# Altium PCB sensorpcb1.PcbDoc
Units mm, origin at the board's own origin, x right, y up, seen from the top; angles counter-clockwise.
Board outline 25.78 x 17.14 mm, 2 copper layers (Top Layer, Bottom Layer); 11 components, 9 nets, 35 pads, 1 vias.
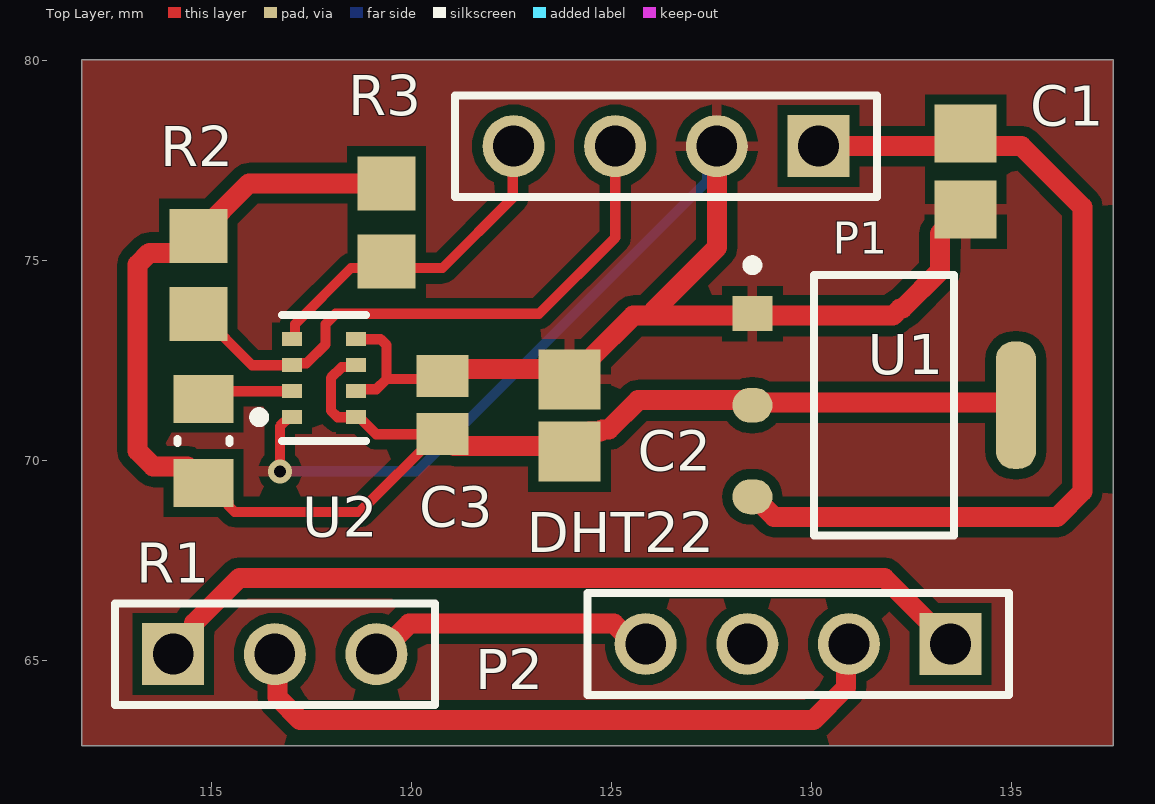
[diagram p0: Top Layer view]
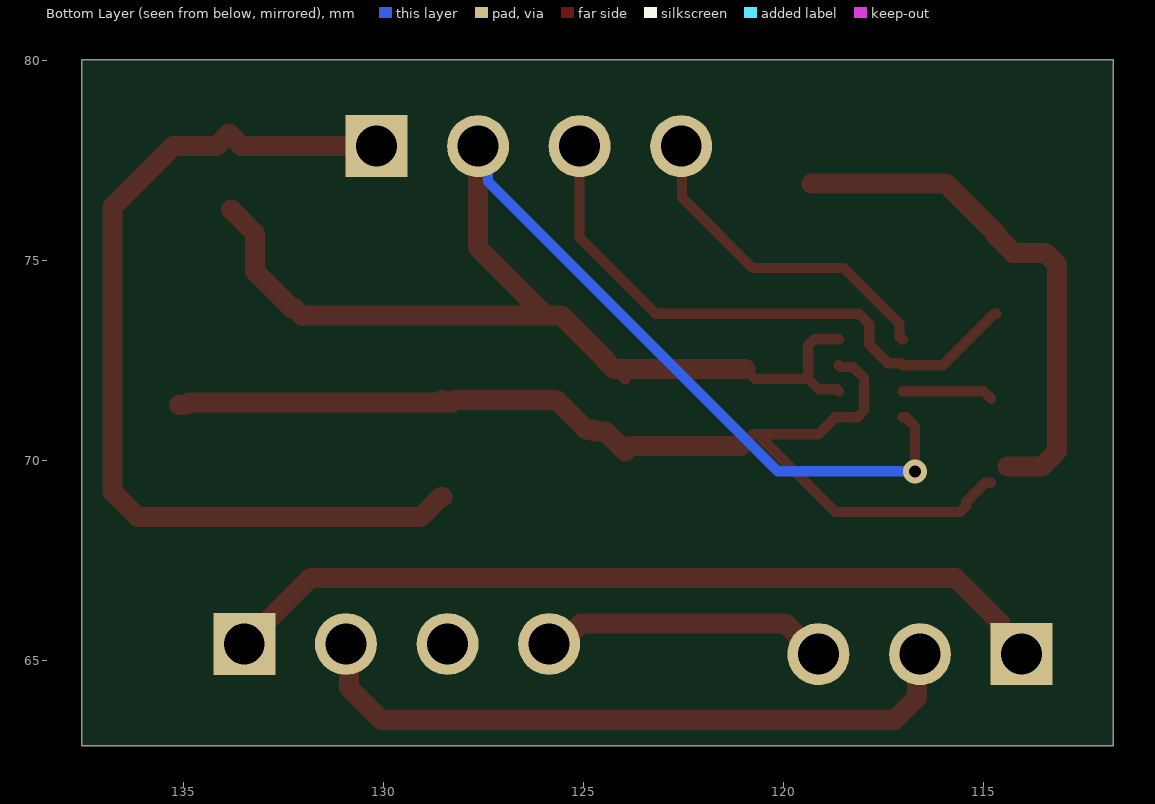
[diagram p1: Bottom Layer view, seen from below]
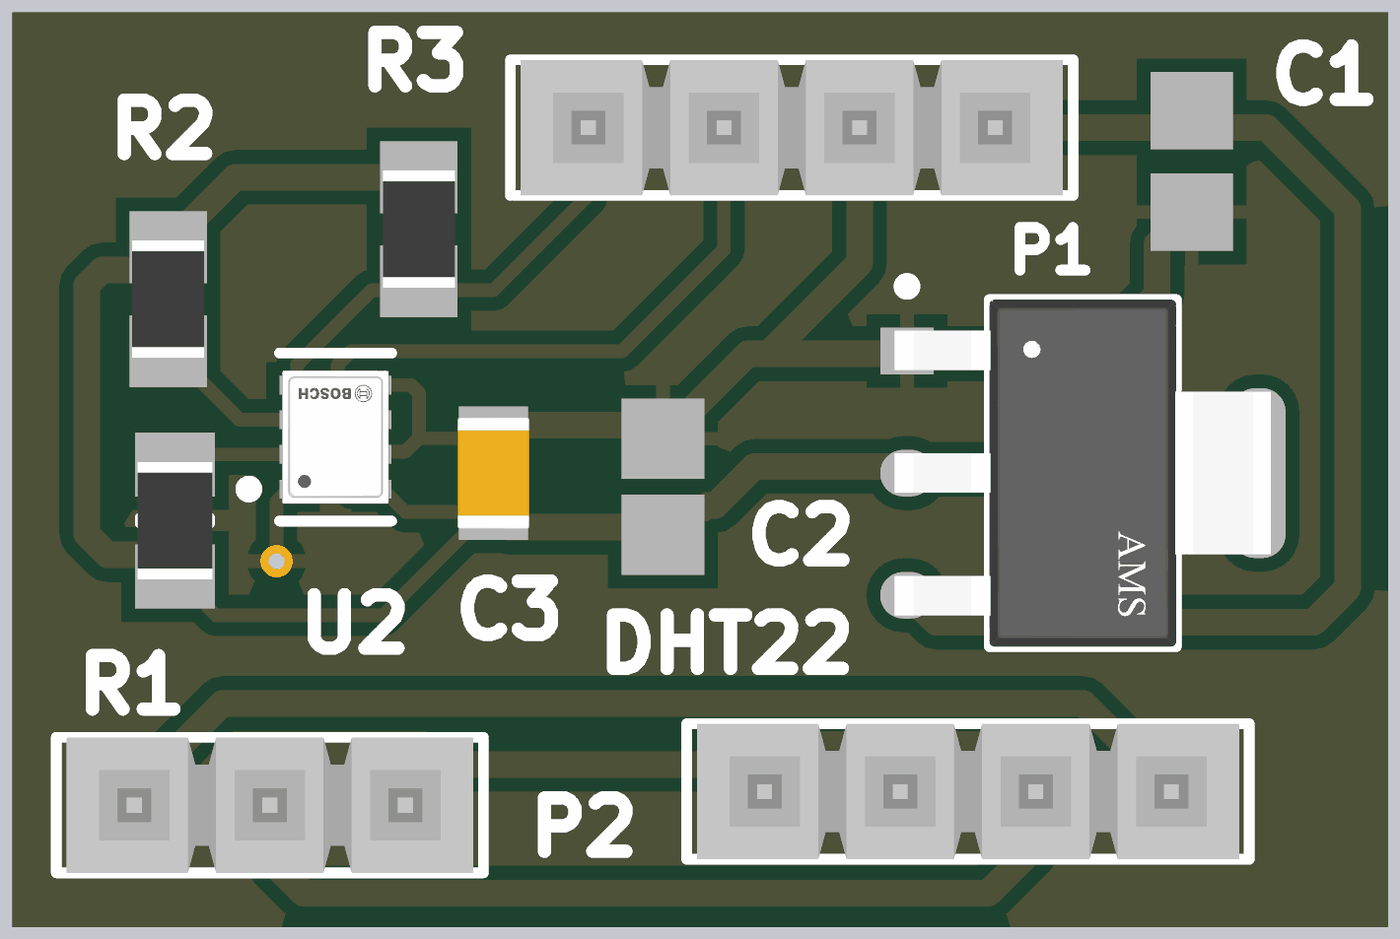
[diagram p2: 3D render of the assembled board from above, using the file's embedded part models]

## Layer stack, top to bottom
Top Solder: solder mask 0.0102, Solder Resist, Dk 3.5
Top Layer: signal copper 0.0356
Dielectric 1: dielectric 0.32, FR-4, Dk 4.8
Bottom Layer: signal copper 0.0356
Bottom Solder: solder mask 0.0102, Solder Resist, Dk 3.5

## Board outline
111.76,62.865 111.76,80.01 137.541,80.01 137.541,62.865

## Design rules (kind name [scope] priority, off if disabled: settings)
Clearance [All] p1: gap=0.254 ignorepadtopadclearanceinfootprint=FALSE
PolygonConnect [All] p1: connectstyle=Relief reliefconductorwidth=0.254 reliefentries=4 polygonreliefangle="90 Angle" airgapwidth=0.254
RoutingVias [All] p1: holewidth=0.711 width=1.27 viastyle="Through Hole" minholewidth=0.711 minwidth=1.27 maxholewidth=0.711 maxwidth=1.27
SolderMaskExpansion [All] p1: expansion=0 istentingtop=FALSE
SupplyNets "Schematic Supply Nets" [InNet('GND')] p1: voltage=0.000
Width [All] p1: maxlimit=0.5 minlimit=0.254 preferedwidth=0.254 minimp=50.000000 maximp=50.000000 favimp=50.000000
30 further rules are at their usual default settings.

## Components (designator, comment, footprint, x,y, rotation, side; value= is the part's Value field where it differs from the comment)
C1 "100nf" CAPC2013X135X50ML15T20 133.858,77.216 r270 top
C2 "10uf" CAPC2013X140X50ML20T25 123.952,71.12 r270 top
C3 "Capacitor 100 nF +/-10% 50 V 0805" CAPC2013X95X50LL10T25 120.777,71.374 r90 top value=100nF
DHT22 "MTSW-104-07-G-S-170" SMTC-MTSW-104-07-X-S-170 133.477,65.405 r180 top
P1 "MTSW-104-07-G-S-170" SMTC-MTSW-104-07-X-S-170 130.175,77.851 r180 top
P2 "TSW-103-07-G-S" SMTC-TSW-103-07-X-S 114.046,65.151 r0 top
R1 "Resistor 10k +/-1% 0805 125 mW" RESC2013X50X35ML15T15 114.808,70.485 r90 top value=10k
R2 "Resistor 4k7 +/-1% 0805 125 mW" RESC2013X70X40ML20T20 114.681,74.635 r90 top value=4.7k
R3 "Resistor 4k7 +/-1% 0805 125 mW" RESC2013X70X40ML20T20 119.38,75.946 r270 top value=4.7k
U1 "AMS1117-3.3" FP-AMS1117-IPC_C 131.819,71.374 r0 top
U2 "BMP280" FP-BMP280-MFG 117.818,72.05 r180 top

## Footprints (in the part's own frame and the unit in brackets; to place one, negate y for a bottom-side part, rotate by r counter-clockwise, add the part's x,y. Pads: shape width x height; smd on the part's side, far side on the other; paste and mask are expansions set on the pad)
CAPC2013X95X50LL10T25 [mm] "Chip Capacitor, 2-Leads, Body 2.10x1.35mm, IPC High Density"
  rect 1.05x1.3 smd: 1(-0.725,0) 2(0.725,0)
  body extent -1.05,-0.67 1.05,0.67, height 0.95
CAPC2013X135X50ML15T20 [mm] "Chip Capacitor, 2-Leads, Body 2.00x1.25mm, IPC Low Density"
  rect 1.45x1.55 smd: 1(-0.95,0) 2(0.95,0)
  body extent -1.08,-0.7 1.07,0.7, height 1.35
CAPC2013X140X50ML20T25 [mm] "Chip Capacitor, 2-Leads, Body 2.00x1.25mm, IPC Low Density"
  rect 1.5x1.55 smd: 1(-0.9,0) 2(0.9,0)
  body extent -1.1,-0.72 1.1,0.72, height 1.4
FP-AMS1117-IPC_C [mm]
  rect 1.004x0.872 smd paste+0 mask+0: 1(-3.295,2.29)
  rrect100% 1.004x0.872 smd paste+0 mask+0: 2(-3.295,0) 3(-3.295,-2.29)
  rrect87% 1.004x3.182 smd paste+0 mask+0: 4(3.295,0)
  silkscreen extent -3.42,-3.25 1.75,3.62, body extent -3.9,-3.35 3.9,3.35, height 0.25
FP-BMP280-MFG [mm]
  rect 0.5x0.35 smd paste+0 mask+0: 1(0.8,0.975) 2(0.8,0.325) 3(0.8,-0.325) 4(0.8,-0.975) 5(-0.8,-0.975) 6(-0.8,-0.325) 7(-0.8,0.325) 8(-0.8,0.975)
  silkscreen extent -1.05,-1.58 1.75,1.58, body extent -1.55,-1.8 1.55,1.8, height 0.25
RESC2013X50X35ML15T15 [mm] "Chip Resistor, 2-Leads, Body 2.2x1.4mm, IPC Low Density"
  rect 1.2x1.5 smd: 1(-1.05,0) 2(1.05,0)
  silkscreen extent -0.05,-0.65 0.05,0.65, body extent -1.1,-0.7 1.1,0.7, height 0.5
RESC2013X70X40ML20T20 [mm] "Chip Resistor, 2-Leads, Body 2.2x1.35mm, IPC Low Density"
  rect 1.35x1.45 smd: 1(-0.975,0) 2(0.975,0)
  body extent -1.1,-0.67 1.1,0.67, height 0.7
SMTC-MTSW-104-07-X-S-170 [mm] "Assembly .025\" [.64] SQ Post Terminal Strip, 1x4 Pins, Vertical, 2.54mm Pitch, Male"
  rect 1.55x1.55 hole 1.02: 1(0,0)
  round 1.55 hole 1.02: 2(2.54,0) 3(5.08,0) 4(7.62,0)
  silkscreen extent -1.46,-1.27 9.08,1.27, body extent -1.27,-1.27 8.89,1.27, height 6.86
SMTC-TSW-103-07-X-S [mm] ".025 SQ Post Terminal Strip Assembly, 1x3 Pins, Vertical, 2.54mm Pitch, Male"
  rect 1.55x1.55 hole 1.02: 1(0,0)
  round 1.55 hole 1.02: 2(2.54,0) 3(5.08,0)
  silkscreen extent -1.46,-1.27 6.54,1.27, body extent -1.27,-1.27 6.35,1.27, height 8.38

## Part data
C1: library part CMP-2007-03440-1, Manufacturer=Vitramon, Part Number=VJ0805Y104KXATW1BC
C2: library part CMP-2007-04644-1, Manufacturer="AVX Interconnect / Elco", Part Number=08056D106KAT4A
C3: library part CMP-001-00018-6, "Chip Capacitor, 100 nF, +/- 10%, 50 V, 0805 (2012 Metric)", Capacitor Type=Ceramic, Case/Package=0805, Max Operating Temperature=125°C, Min Operating Temperature=-55°C, Tolerance=10%, Voltage Rating=50V, Mounting Technology=SM, Pins=2, RoHS Compliant=True
DHT22 P1: library part CMP-1024-00104-1, "Modified .025\" SQ Post Header, Through-hole, Vertical, -55 to 125 degC, 2.54 mm Pitch, 4-Pin, Male, RoHS", Manufacturer=Samtec, Temperature Range="-55 to 125 degC", ComponentLink1Description="Manufacturer URL", ComponentLink1URL=http://www.samtec.com, ComponentLink2Description=Datasheet, ComponentLink2URL=http://www.samtec.com/documents/webfiles/pdf/MTSW.PDF, ComponentLink3Description="Package Specification", ComponentLink3URL=http://www.samtec.com/documents/webfiles/cpdf/MTSW-XXX-XX-X-X-XXXX-XX-XXX-MKT1.pdf, DatasheetVersion=F-214, Mounting Technology=Through-hole, Orientation=Vertical, PackageDescription="Assembly .025\" [.64] SQ Post Terminal Strip", PackageReference=MTSW-104-07-X-S-170, PackageVersion="BI, 2/1987", PartNumber=MTSW-104-07-G-S-170, Pitch="2.54 mm", RoHS=True
P2: library part CMP-1024-00333-1, "0.025\" SQ Post Header, Through-hole, Vertical, -55 to 125 degC, 2.54 mm Pitch, 3-Pin, Male, RoHS", Manufacturer=Samtec, Temperature Range="-55 to 125 degC", ComponentLink1Description="Manufacturer URL", ComponentLink1URL=http://www.samtec.com, ComponentLink2Description=Datasheet, ComponentLink2URL=http://www.samtec.com/documents/webfiles/pdf/TSW_TH.PDF, ComponentLink3Description="Package Specification", ComponentLink3URL=http://www.samtec.com/documents/webfiles/cpdf/TSW-XXX-XX-XXX-X-XX-XXX-MKT.pdf, DatasheetVersion=F-214, Mounting Technology=Through-hole, Orientation=Vertical, PackageDescription=".025[0.64] SQ. Post Terminal Strip Assembly", PackageReference=TSW-103-07-X-S, PackageVersion="DM, 8/1988", PartNumber=TSW-103-07-G-S, Pitch="2.54 mm", RoHS=True
R1: library part CMP-009-00018-5, "Chip Resistor, 10 KOhm, +/- 1%, 125 mW, -55 to 155 degC, 0805 (2012 Metric)", Case/Package=0805, Max Operating Temperature=155°C, Min Operating Temperature=-55°C, Power=125mW, Tolerance=1%, Voltage Rating=150V, Mounting Technology=SM, Pins=2, RoHS Compliant=True
R2 R3: library part CMP-009-00032-5, "Chip Resistor, 4.7 KOhm, +/- 1%, 0.125 W, -55 to 155 degC, 0805 (2012 Metric)", Case/Package=0805, Max Operating Temperature=155°C, Min Operating Temperature=-55°C, Power=125mW, Tolerance=1%, Voltage Rating=150V, Mounting Technology=SM, Pins=2, RoHS Compliant=True
U1: library part CMP-209535-000001-1, "LDO Voltage Regulators 1A, 3.3V", Dropout Voltage=1.1V, Manufacturer="Advanced Monolithic Systems", Max Junction Temp=+125°C, Max Power Dissipation=1.2W, Max Supply Voltage=15V, Nominal Supply Current=5mA, Output Current=1A, Output Voltage=3.3V, Package=AMS1117, Temperature="-40°C to +125°C", Temperature Range Low=-40°C, Automotive=No, Category=IC, ComponentLink2Description=Datasheet, ComponentLink2URL=http://www.advanced-monolithic.com/pdf/ds1117.pdf, Device Class L1="Integrated Circuits (ICs)", Device Class L2="Power Management ICs", Device Class L3="Voltage Regulators - Linear", Height=1.8mm, Ipc Land Pattern Name=SOT229P700X180-4, Lead Free=Yes, Manufacturer Part Number=AMS1117-3.3, Number Of Outputs=1, Octopart=https://octopart.com/ams1117-3.3-advanced+monolithic+systems-25899300, Output Type=Fixed, RoHS=TRUE, Standoff Height=0.64mm, Temperature Range High=+125°C
U2: library part CMP-2000-05076-3, "SENSOR PRESSURE ABS", Case/Package=SMD/SMT, Max Operating Temperature=85°C, Min Operating Temperature=-40°C, Operating Pressure=15.95PSI, Lead Free="Lead Free", Max Pressure=290.08PSI, Number of Pins=8, Output Type=SPI, Port Style="No Port", Pressure Type=Absolute, Termination=SMD/SMT

## Via types
v1: diameter 0.6, hole 0.3, Top Layer to Bottom Layer, 1 vias

## Nets (pads, with @x,y where several pads share a name; then routed paths per layer and width w, separated by ;. In a path a pad name is that pad's centre, name@x,y a point inside that pad or via, vN(x,y) a via of type N, cw(c..) or ccw(c..) an arc to the next point about the centre after c; other vN are vias at no path point)
3.3v: C2.2 C3.1 R1.1 R2.2 R3.1 U1.2 U1.4 U2.6 U2.8 | length 39.3
  Top Layer w0.254: R1.1 114.958,69.435 115.431,68.962 115.431,68.856 115.58,68.707 118.71,68.707 C3.1@120.652,70.649 ; U2.8@118.495,71.075 118.155,71.075 117.987,71.243 117.987,72.058 118.256,72.327 118.57,72.327 U2.6 ; U2.8 118.693,71.075 119.119,70.649 C3.1@120.652,70.649 ; C3.1 C3.1@120.652,70.649 ; C2.2@123.814,70.358 C2.2
  Top Layer w0.5: R1.1@114.4,69.843 113.545,69.843 113.157,70.231 113.157,74.892 113.45,75.185 114.256,75.185 R2.2 ; R2.2@114.631,75.61 115.942,76.921 R3.1@119.294,76.921 ; C3.1@121.068,70.358 C2.2@123.814,70.358 ; C2.2 124.452,70.72 124.724,70.72 124.77,70.766 124.936,70.766 125.671,71.501 128.23,71.501 128.286,71.445 128.468,71.445 128.524,71.501 128.58,71.445 134.876,71.445 134.947,71.374 U1.4
GND: C1.2 C2.1 C3.2 P1.2 U1.1 U2.1 U2.5 U2.7 | length 40.7
  Top Layer w0.254: v1(116.713,69.723) 116.713,70.845 116.943,71.075 U2.1 ; U2.7 118.666,71.773 119.122,71.773 119.38,72.031 ; U2.5 119.231,73.025 119.38,72.876 119.38,72.031 ; C3.2@120.952,72.274 120.709,72.031 119.38,72.031 ; C2.1 C2.1@124.211,72.279 ; 132.214,73.791 132.28,73.791 ; C1.2@133.808,76.266 C1.2
  Top Layer w0.5: C3.2@120.952,72.274 C2.1@124.217,72.274 ; C2.1@124.211,72.279 124.236,72.279 124.477,72.52 124.477,72.545 125.543,73.611 132.034,73.611 132.214,73.791 ; 126.049,73.725 127.635,75.311 P1.2 ; 132.28,73.791 133.21,74.721 133.21,75.668 C1.2@133.808,76.266
  Bottom Layer w0.254: v1(116.713,69.723) 120.142,69.723 127.389,76.97 127.389,77.605 P1.2
NetC1_1: C1.1 P1.1 U1.3 | length 23.3
  Top Layer w0.5: U1.3 128.565,69.084 129.069,68.58 136.144,68.58 136.779,69.215 136.779,76.327 135.255,77.851 134.173,77.851 C1.1 133.543,77.851 P1.1
NetDHT22_1: DHT22.1 P2.1 | length 21.2
  Top Layer w0.5: P2.1@113.916,65.148 114.043,65.148 114.571,65.676 114.571,65.93 115.697,67.056 131.826,67.056 DHT22.1
NetDHT22_2: DHT22.2 P2.2 | length 17
  Top Layer w0.5: P2.2 116.656,65.081 116.656,64.065 117.221,63.5 130.048,63.5 130.867,64.319 130.867,65.335 DHT22.2
NetDHT22_4: DHT22.4 P2.3 | length 7.3
  Top Layer w0.5: P2.3 119.182,65.151 119.944,65.913 125.065,65.913 125.573,65.405 DHT22.4
NetP1_3: P1.3 R2.1 U2.3 | length 14.9
  Top Layer w0.254: R2.1 114.731,73.66 116.016,72.375 U2.3 117.066,72.423 117.38,72.423 117.856,72.899 117.856,73.406 118.11,73.66 123.19,73.66 125.095,75.565 P1.3
NetP1_4: P1.4 R3.2 U2.4 | length 8.5
  Top Layer w0.254: U2.4 117.046,73.025 117.094,73.073 117.094,73.406 118.491,74.803 119.38,74.803 120.777,74.803 122.533,76.559 122.533,77.829 P1.4
NetR1_2: R1.2 U2.2 | length 2.3
  Top Layer w0.254: R1.2 114.998,71.725 U2.2
pads on no net: DHT22.3

## Polygon pours and split planes (outlines as drawn)
GND on Top Layer "GND_L01_P000" (solid, pour order 0): 111.76,80.01 137.541,80.01 137.541,62.865 111.76,62.865